# Altium PCB CopperMask.PcbDoc
Units mil, origin at the board's own origin, x right, y up, seen from the top; angles counter-clockwise.
Board outline 6000 x 4000 mil, 2 copper layers (Top Layer, Bottom Layer); 1 components, 0 nets, 0 pads, 0 vias.
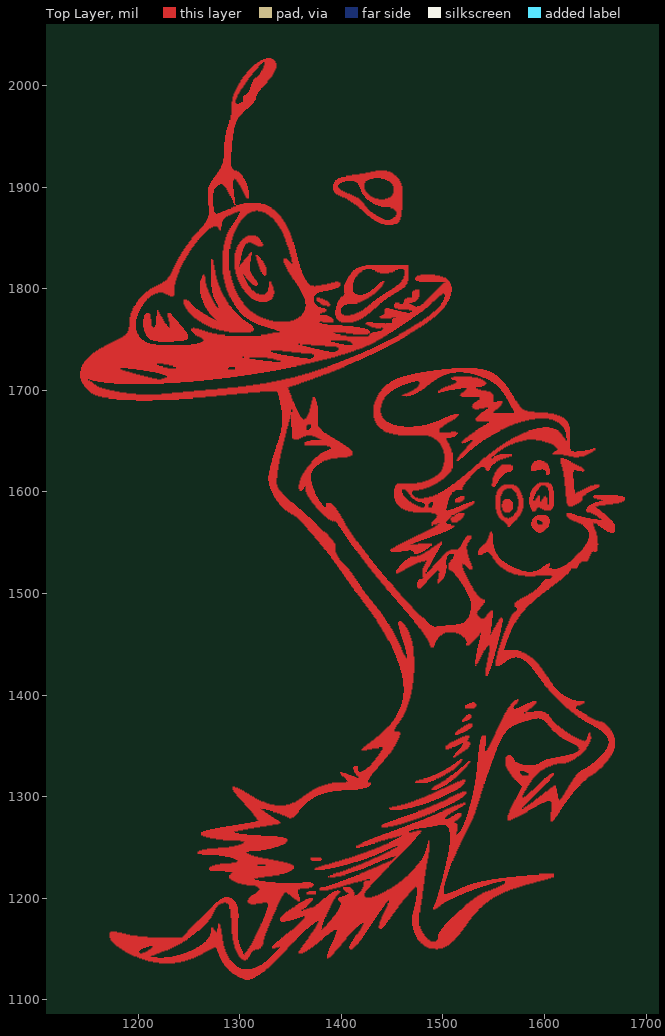
[diagram p0: Top Layer view]
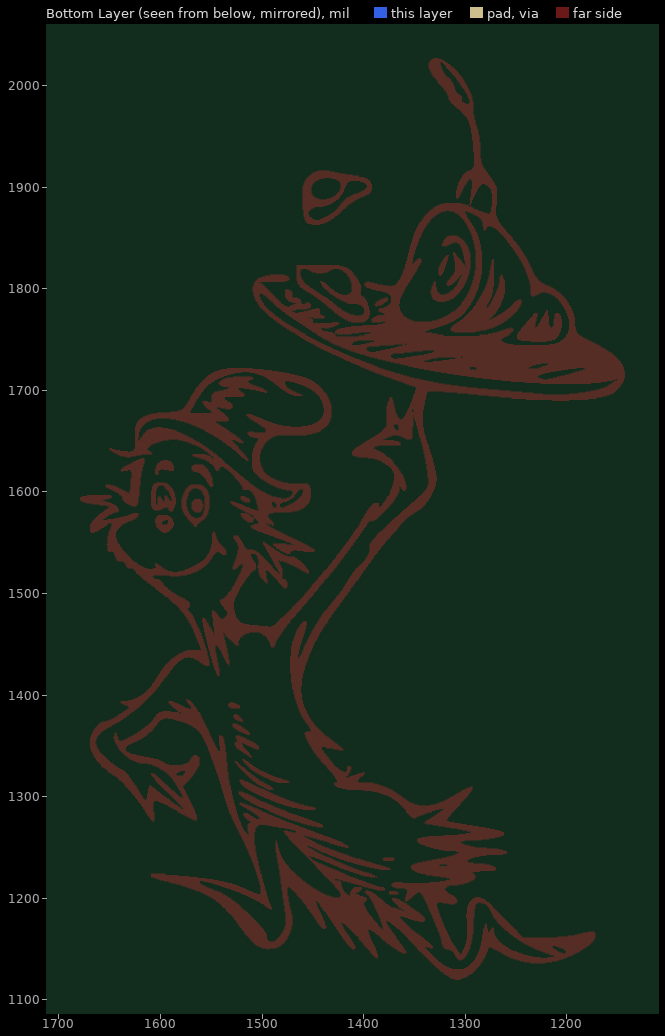
[diagram p1: Bottom Layer view, seen from below]

## Layer stack, top to bottom
Top Layer: signal copper 1.4
Dielectric: dielectric 12.6, FR-4, Dk 4.8
Bottom Layer: signal copper 1.4

## Board outline
1000,1000 7000,1000 7000,5000 1000,5000

## Design rules (kind name [scope] priority, off if disabled: settings)
Clearance [All] p1: gap=10
PolygonConnect [All] p1: connectstyle=Relief reliefconductorwidth=10 reliefentries=4 polygonreliefangle="90 Angle"
RoutingVias [All] p1: holewidth=28 width=50 viastyle="Through Hole" minholewidth=28 minwidth=50 maxholewidth=28 maxwidth=50
SilkscreenOverComponentPads [All] p1: minsilkscreentomaskgap=10
SolderMaskExpansion [All] p1: expansion=4
Width [All] p1: maxlimit=10 minlimit=10 preferedwidth=10
27 further rules are at their usual default settings.

## Components (designator, comment, footprint, x,y, rotation, side; value= is the part's Value field where it differs from the comment)
Designator1 "Comment" ? 1000,1000 r0 top

## Footprints (in the part's own frame and the unit in brackets; to place one, negate y for a bottom-side part, rotate by r counter-clockwise, add the part's x,y. Pads: shape width x height; smd on the part's side, far side on the other; paste and mask are expansions set on the pad)
? [mil]
  Top Layer region: 10149 vertices and 26 holes, not listed, extent 143,120 679,1027
  Top Layer region: 814 vertices and 6 holes, not listed, extent 432,539 650,722
  Top Layer region: 182 vertices and 1 holes, not listed, extent 394,767 466,823
  Top Layer region: 170 vertices and 2 holes, not listed, extent 392,863 460,916
  Top Layer region: 385 vertices and 0 holes, not listed, extent 245,757 314,829
  Top Layer region: 335 vertices and 0 holes, not listed, extent 295,787 334,852
  Top Layer region: 124 vertices and 1 holes, not listed, extent 552,566 579,607
  Top Layer region: 180 vertices and 0 holes, not listed, extent 205,748 249,779
  Top Layer region: 171 vertices and 0 holes, not listed, extent 616,586 654,633
  Top Layer region: 90 vertices and 1 holes, not listed, extent 585,581 609,609
  Top Layer region: 523,304 523,303 522,303 522,302 521,302 521,301 520,301 520,300 519,300 519,299 517,299 517,298 516,298 516,297 514,297 514,296 512,296 512,295 511,295 511,294 509,294 509,293 507,293 507,292 505,292 505,291 503,291 503,290 501,290 501,289 498,289 498,288 496,288 496,287 494,287 494,286 492,286 492,285 489,285 489,284 487,284 487,283 484,283 484,282 482,282 482,281 479,281 479,280 477,280 477,279 474,279 474,278 471,278 471,277 468,277 468,276 465,276 465,275 462,275 462,274 459,274 459,273 455,273 455,272 451,272 451,271 446,271 446,270 440,270 440,271 440,272 441,272 441,273 443,273 443,274 446,274 446,275 448,275 448,276 451,276 451,277 454,277 454,278 456,278 456,279 459,279 459,280 462,280 462,281 465,281 465,282 468,282 468,283 471,283 471,284 474,284 474,285 476,285 476,286 479,286 479,287 482,287 482,288 484,288 484,289 487,289 487,290 489,290 489,291 491,291 491,292 494,292 494,293 496,293 496,294 498,294 498,295 501,295 501,296 503,296 503,297 505,297 505,298 506,298 506,299 508,299 508,300 510,300 510,301 512,301 512,302 514,302 514,303 517,303 517,304 519,304 519,305 523,305
  Top Layer region: 522,316 522,315 521,315 521,314 521,313 520,313 520,312 519,312 519,311 518,311 518,310 517,310 517,309 515,309 515,308 514,308 514,307 512,307 512,306 510,306 510,305 508,305 508,304 506,304 506,303 504,303 504,302 502,302 502,301 500,301 500,300 498,300 498,299 496,299 496,298 493,298 493,297 491,297 491,296 488,296 488,295 486,295 486,294 483,294 483,293 480,293 480,292 477,292 477,291 473,291 473,290 470,290 470,289 465,289 465,288 460,288 460,287 448,287 448,288 447,288 447,289 450,289 450,290 455,290 455,291 459,291 459,292 463,292 463,293 466,293 466,294 469,294 469,295 472,295 472,296 474,296 474,297 477,297 477,298 479,298 479,299 482,299 482,300 484,300 484,301 486,301 486,302 489,302 489,303 491,303 491,304 493,304 493,305 495,305 495,306 497,306 497,307 499,307 499,308 502,308 502,309 504,309 504,310 506,310 506,311 508,311 508,312 510,312 510,313 512,313 512,314 514,314 514,315 517,315 517,316 519,316 519,317 522,317
  Top Layer region: 602,576 603,576 603,575 604,575 604,574 604,573 605,573 605,572 605,571 605,570 605,569 604,569 604,568 604,567 604,566 603,566 603,565 602,565 602,564 601,564 601,563 600,563 600,562 599,562 599,561 597,561 597,560 594,560 594,561 592,561 592,562 591,562 591,563 590,563 590,564 589,564 589,565 588,565 588,566 588,567 587,567 587,568 587,569 587,570 588,570 588,571 588,572 588,573 589,573 589,574 590,574 590,575 591,575 591,576 593,576 593,577 602,577 hole: 595,572 593,572 593,571 593,570 593,569 594,569 594,568 598,568 598,569 598,570 597,570 597,571 595,571
  Top Layer region: 526,359 526,358 525,358 525,357 525,356 524,356 524,355 524,354 526,354 526,353 527,353 527,352 527,351 526,351 526,350 526,349 525,349 525,348 524,348 524,347 522,347 522,346 521,346 521,345 519,345 519,344 518,344 518,343 516,343 516,342 515,342 515,341 513,341 513,340 512,340 512,339 510,339 510,340 511,340 511,341 512,341 512,342 512,343 513,343 513,344 514,344 514,345 515,345 515,346 516,346 516,347 517,347 517,348 518,348 518,349 519,349 519,350 519,351 520,351 520,352 520,353 518,353 518,352 516,352 516,351 514,351 514,350 512,350 512,349 509,349 509,348 506,348 506,347 503,347 503,348 503,349 503,350 505,350 505,351 506,351 506,352 507,352 507,353 509,353 509,354 511,354 511,355 513,355 513,356 515,356 515,357 517,357 517,358 519,358 519,359 522,359 522,360 526,360
  Top Layer region: 567,626 569,626 569,625 569,624 569,623 569,622 568,622 568,621 567,621 567,620 563,620 563,619 561,619 561,618 560,618 560,617 559,617 559,616 558,616 558,615 557,615 557,614 556,614 556,613 555,613 555,612 555,611 554,611 554,610 554,609 553,609 553,608 552,608 552,607 552,606 551,606 551,605 549,605 549,606 548,606 548,607 548,608 549,608 549,609 549,610 549,611 549,612 549,613 549,614 550,614 550,615 550,616 551,616 551,617 551,618 551,619 552,619 552,620 553,620 553,621 553,622 554,622 554,623 555,623 555,624 556,624 556,625 557,625 557,626 558,626 558,627 567,627
  Top Layer region: 519,336 518,336 518,335 518,334 517,334 517,333 516,333 516,332 515,332 515,331 514,331 514,330 513,330 513,329 512,329 512,328 511,328 511,327 510,327 510,326 508,326 508,325 507,325 507,324 505,324 505,323 503,323 503,322 502,322 502,321 500,321 500,320 498,320 498,319 496,319 496,318 493,318 493,317 491,317 491,316 488,316 488,315 485,315 485,314 473,314 473,315 474,315 474,316 477,316 477,317 481,317 481,318 485,318 485,319 488,319 488,320 490,320 490,321 493,321 493,322 495,322 495,323 497,323 497,324 499,324 499,325 501,325 501,326 503,326 503,327 504,327 504,328 506,328 506,329 508,329 508,330 509,330 509,331 510,331 510,332 512,332 512,333 513,333 513,334 514,334 514,335 516,335 516,336 517,336 517,337 519,337
  Top Layer region: 597,630 600,630 600,629 602,629 602,628 603,628 603,627 603,626 604,626 604,625 604,624 604,623 605,623 605,622 605,621 605,620 605,619 605,618 604,618 604,617 602,617 602,618 602,619 602,620 602,621 601,621 601,622 599,622 599,623 597,623 597,622 592,622 592,621 587,621 587,622 587,623 587,624 587,625 587,626 588,626 588,627 588,628 589,628 589,629 590,629 590,630 593,630 593,631 597,631
  Top Layer region: 527,334 526,334 526,333 525,333 525,332 524,332 524,331 524,330 523,330 523,329 522,329 522,328 521,328 521,327 520,327 520,326 519,326 519,325 518,325 518,324 517,324 517,323 516,323 516,322 515,322 515,321 514,321 514,320 513,320 513,319 512,319 512,318 510,318 510,317 509,317 509,316 508,316 508,315 506,315 506,314 505,314 505,313 504,313 504,312 502,312 502,311 500,311 500,310 498,310 498,309 496,309 496,308 494,308 494,307 489,307 489,308 490,308 490,309 491,309 491,310 492,310 492,311 494,311 494,312 496,312 496,313 498,313 498,314 499,314 499,315 501,315 501,316 503,316 503,317 504,317 504,318 506,318 506,319 507,319 507,320 508,320 508,321 510,321 510,322 511,322 511,323 512,323 512,324 514,324 514,325 515,325 515,326 516,326 516,327 517,327 517,328 518,328 518,329 520,329 520,330 521,330 521,331 522,331 522,332 523,332 523,333 524,333 524,334 525,334 525,335 527,335
  Top Layer region: 566,592 567,592 567,591 568,591 568,590 569,590 569,589 569,588 569,587 569,586 569,585 569,584 569,583 568,583 568,582 567,582 567,581 566,581 566,580 561,580 561,581 560,581 560,582 559,582 559,583 559,584 559,585 558,585 558,586 558,587 558,588 559,588 559,589 559,590 559,591 560,591 560,592 561,592 561,593 566,593
  Top Layer region: 318,832 319,832 319,831 320,831 320,830 321,830 321,829 321,828 322,828 322,827 323,827 323,826 323,825 324,825 324,824 324,823 325,823 325,822 325,821 326,821 326,820 326,819 326,818 326,817 326,816 326,815 326,814 325,814 325,813 324,813 324,814 323,814 323,815 322,815 322,816 322,817 321,817 321,818 321,819 320,819 320,820 320,821 320,822 319,822 319,823 319,824 319,825 318,825 318,826 318,827 318,828 317,828 317,829 317,830 317,831 317,832 316,832 316,833 318,833
  Top Layer region: 529,371 529,370 529,369 528,369 528,368 527,368 527,367 525,367 525,366 524,366 524,365 522,365 522,364 520,364 520,363 517,363 517,362 515,362 515,361 512,361 512,362 512,363 513,363 513,364 514,364 514,365 515,365 515,366 517,366 517,367 518,367 518,368 520,368 520,369 521,369 521,370 523,370 523,371 525,371 525,372 529,372
  Top Layer region: 379,790 382,790 382,789 384,789 384,788 386,788 386,787 387,787 387,786 388,786 388,785 389,785 389,784 388,784 388,783 386,783 386,784 382,784 382,785 380,785 380,786 379,786 379,787 377,787 377,788 376,788 376,789 376,790 376,791 379,791
  Top Layer region: 531,392 532,392 532,391 533,391 533,390 533,389 532,389 532,388 531,388 531,387 522,387 522,388 522,389 522,390 524,390 524,391 526,391 526,392 529,392 529,393 531,393
  Top Layer region: 521,595 521,594 521,593 520,593 520,592 519,592 519,591 517,591 517,590 512,590 512,591 512,592 512,593 513,593 513,594 515,594 515,595 517,595 517,596 521,596
  Top Layer region: 527,380 528,380 528,379 528,378 527,378 527,377 526,377 526,376 524,376 524,375 521,375 521,374 519,374 519,375 519,376 520,376 520,377 521,377 521,378 522,378 522,379 523,379 523,380 525,380 525,381 527,381
  Top Layer region: 380,239 381,239 381,238 380,238 380,237 371,237 371,238 370,238 370,239 370,240 380,240
  Top Layer region: 375,206 375,205 375,204 366,204 366,205 366,206 368,206 368,207 375,207
  Top Layer region: 388,221 387,221 387,222 388,222
  Top Layer region: 533,429 532,429 532,430 533,430

## Nets (pads, with @x,y where several pads share a name; then routed paths per layer and width w, separated by ;. In a path a pad name is that pad's centre, name@x,y a point inside that pad or via, vN(x,y) a via of type N, cw(c..) or ccw(c..) an arc to the next point about the centre after c; other vN are vias at no path point)